# EAGLE board Cool Wluff (EAGLE 9.7.0)

Size 92.61 x 103.18 mm. Coordinates in mm from the lower left corner, seen from the top.
Outline: 0,0 92.61,0 92.61,103.18 0,103.18 0,0
Copper layers (1*16): Top 0.035mm / dielectric 1.5mm / Bottom 0.035mm
Design rules "default": minimum track width 6mil, minimum drill 0.35mm, track to track 6mil, track to pad 6mil, pad to pad 6mil, via to via 6mil, smd to smd 6mil, copper to edge 40mil, drill to drill 6mil, minimum pad ring 10mil, minimum via ring 8mil, stop-mask expansion 4mil, vias tented up to drill 0mil, thermal gap 10mil

## Footprints (pad centres in the part's own frame; a part is rotated, then mirrored left to right if it is on the bottom)
LEDRD254W60D565H860B = drill 0.981 pad 1.581: 1 -1.27,0; 2 1.27,0
RESAD1016W63L850D250B = drill 0.83 pad 1.43: 1 -5.08,0; 2 5.08,0
SWITCH-MOMENTARY-PTH-6.5MM = drill 1.016 pad 1.88: 1 -3.251,2.261; 2 3.251,2.261; 3 -3.251,-2.261; 4 3.251,-2.261
ARDUINO-UNO-R3-SHIELD = drill 1.016 pad 1.88: 3.3V 24.13,-2.54; 5V 24.13,0; A0 24.13,12.7; A1 24.13,15.24; A2 24.13,17.78; A3 24.13,20.32; A4 24.13,22.86; A5 24.13,25.4; AREF -24.13,-13.97; D2 -24.13,20.32; D3 -24.13,17.78; D4 -24.13,15.24; D5 -24.13,12.7; D6 -24.13,10.16; D7 -24.13,7.62; D8 -24.13,3.81; D9 -24.13,1.27; D10 -24.13,-1.27; D11 -24.13,-3.81; D12 -24.13,-6.35; D13 -24.13,-8.89; GND@0 24.13,2.54; GND@1 24.13,5.08; GND@2 -24.13,-11.43; IOREF 24.13,-7.62; NC 24.13,-10.16; RES 24.13,-5.08; RX -24.13,25.4; SCL -24.13,-19.05; SDA -24.13,-16.51; TX -24.13,22.86; VIN 24.13,7.62

## Placement (x,y rotation side)
D1  RED  [LEDRD254W60D565H860B]  52.6,95.13 0 top
D2  RED  [LEDRD254W60D565H860B]  62.76,95.13 0 top
D3  RED  [LEDRD254W60D565H860B]  83.08,95.13 0 top
D4  RED  [LEDRD254W60D565H860B]  72.92,95.13 0 top
R1  390  [RESAD1016W63L850D250B]  79.27,82.43 90 top
R2  390  [RESAD1016W63L850D250B]  69.11,82.43 90 top
R3  390  [RESAD1016W63L850D250B]  48.79,82.43 90 top
R4  390  [RESAD1016W63L850D250B]  58.95,82.43 90 top
S1  SWITCH_MOMENTARY  [SWITCH-MOMENTARY-PTH-6.5MM]  74.19,88.78 90 top
S2  SWITCH_MOMENTARY  [SWITCH-MOMENTARY-PTH-6.5MM]  84.35,88.78 90 top
S3  SWITCH_MOMENTARY  [SWITCH-MOMENTARY-PTH-6.5MM]  64.03,88.78 90 top
S4  SWITCH_MOMENTARY  [SWITCH-MOMENTARY-PTH-6.5MM]  53.87,88.78 90 top
UARDUINO1  ARDUINO-UNO-R3-SHIELD  [ARDUINO-UNO-R3-SHIELD]  47.88,29.84 270 top

## Library data of the parts
D1-D4 = Tinkercad; CATEGORY: Opto-Electronic; SUB-CATEGORY: LED; VALUE: LED_RED
R1-R4 S1-S4 UARDUINO1 = Tinkercad

## Nets
D1_C: D1.2 R3.2
D2_C: D2.2 R4.2
D3_C: D3.2 R1.2
D4_C: D4.2 R2.2
UARDUINO1_D4: S2.3 S2.4 UARDUINO1.D4
UARDUINO1_D5: S1.3 S1.4 UARDUINO1.D5
UARDUINO1_D6: S3.3 S3.4 UARDUINO1.D6
UARDUINO1_D7: S4.3 S4.4 UARDUINO1.D7
UARDUINO1_D8: R1.1 UARDUINO1.D8
UARDUINO1_D9: R2.1 UARDUINO1.D9
UARDUINO1_D10: R4.1 UARDUINO1.D10
UARDUINO1_D11: R3.1 UARDUINO1.D11
UARDUINO1_GND: D1.1 D2.1 D3.1 D4.1 S1.1 S1.2 S2.1 S2.2 S3.1 S3.2 S4.1 S4.2 UARDUINO1.GND@0 UARDUINO1.GND@1 UARDUINO1.GND@2

## Tracks (layer width: path | path; a pad name or v marks a point on that pad's centre or on a via)
D1_C  (1 unrouted)
D2_C  (1 unrouted)
D3_C  (1 unrouted)
D4_C  (1 unrouted)
UARDUINO1_D4  (2 unrouted)
UARDUINO1_D5  (2 unrouted)
UARDUINO1_D6  (2 unrouted)
UARDUINO1_D7  (2 unrouted)
UARDUINO1_D8  (1 unrouted)
UARDUINO1_D9  (1 unrouted)
UARDUINO1_D10  (1 unrouted)
UARDUINO1_D11  (1 unrouted)
UARDUINO1_GND  (14 unrouted)